# EAGLE board brush_motor_pcb_v1.1 (EAGLE 8.0.1)
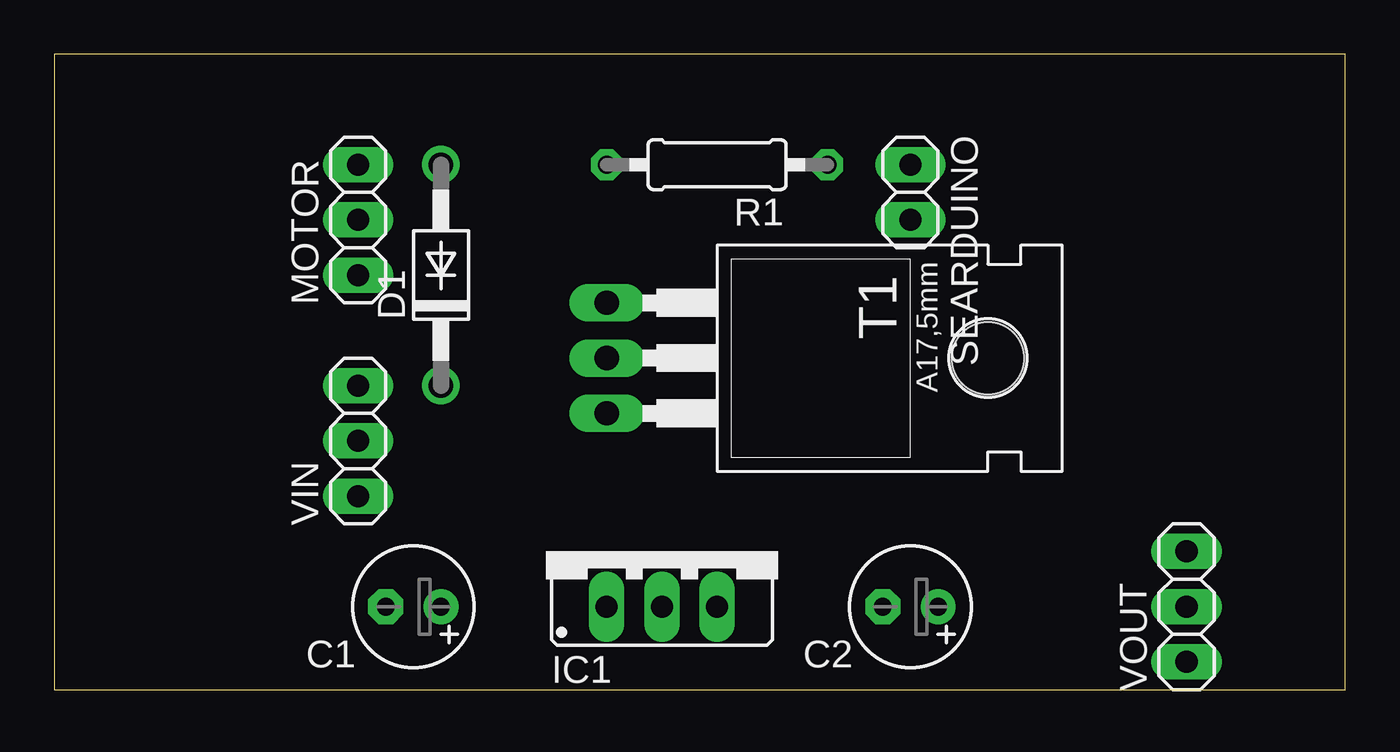
[diagram p0: board, top side]
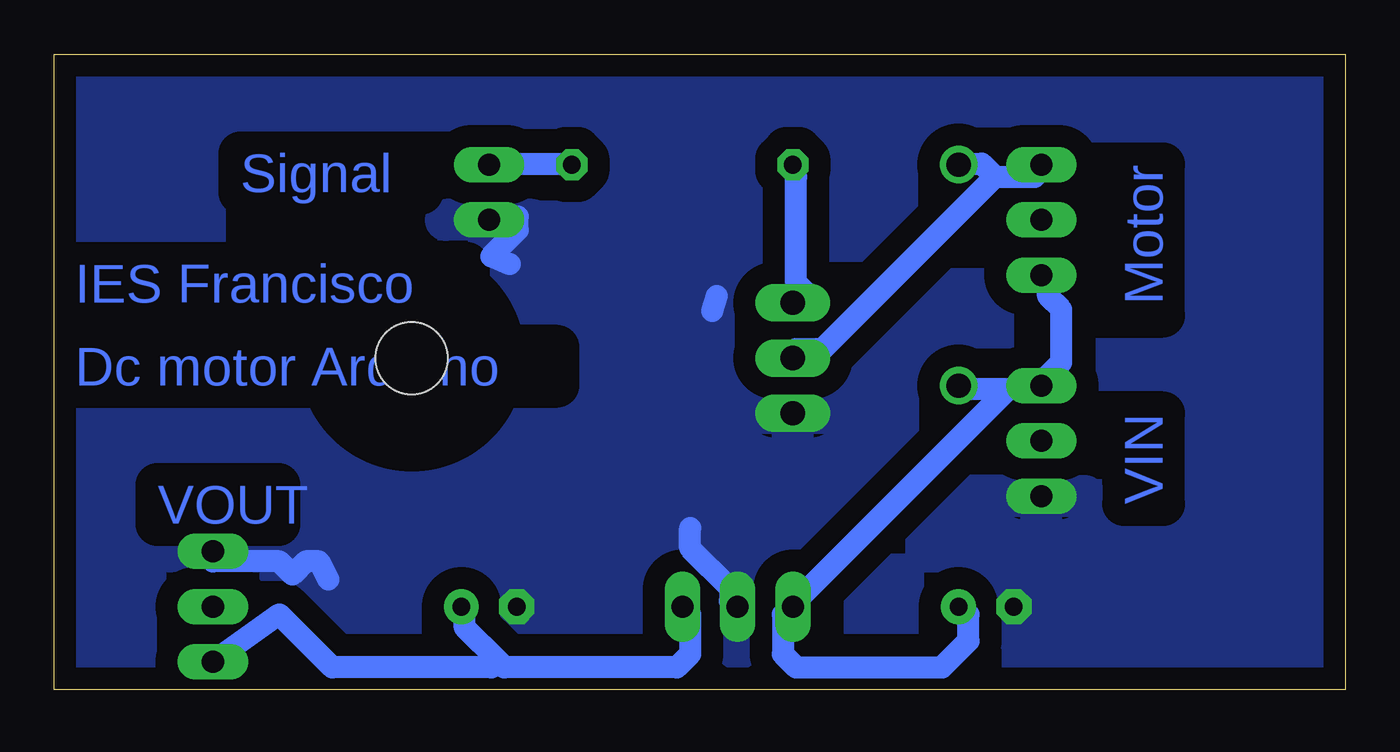
[diagram p1: board, bottom side, seen from below]

Size 59.36 x 29.2 mm. Coordinates in mm from the lower left corner, seen from the top.
Outline: 0,0 59.36,0 59.36,29.2 0,29.2 0,0
Copper layers (1*16): Top 0.035mm / dielectric 1.5mm / Bottom 0.035mm
Design rules "SparkFun *": minimum track width 40mil, minimum drill 20mil, track to track 8mil, track to pad 8mil, pad to pad 8mil, via to via 8mil, smd to smd 8mil, copper to edge 10mil, drill to drill 8mil, minimum pad ring 12mil, minimum via ring 10mil, stop-mask expansion 4mil, vias tented up to drill 25mil, thermal gap 10mil

## Footprints (pad centres in the part's own frame; a part is rotated, then mirrored left to right if it is on the bottom)
E2,5-6 = drill 0.813 pad 1.6: + -1.27,0 | drill 0.813 pad 1.6 octagon: - 1.27,0
DO41-10 = drill 1.118: A 5.08,0; C -5.08,0
78XXS = drill 1.016 long: GND 0,-2.54; IN -2.54,-2.54; OUT 2.54,-2.54
1X03 = drill 1.016 long: 1 -2.54,0; 2 0,0; 3 2.54,0
0207/10 = drill 0.813 octagon: 1 -5.08,0; 2 5.08,0
1X02 = drill 1.016 long: 1 -1.27,0; 2 1.27,0
TO220 = drill 1.118 long: 1 -2.54,-6.35; 2 0,-6.35; 3 2.54,-6.35 | hole 3.302: 0,11.176

## Placement (x,y rotation side)
C1  [E2,5-6]  16.51,3.81 180 top
C2  [E2,5-6]  39.37,3.81 180 top
D1  1N4004  [DO41-10]  17.78,19.05 90 top
IC1  [78XXS]  27.94,6.35 0 top
MOTOR  [1X03]  13.97,21.59 90 top
R1  [0207/10]  30.48,24.13 180 top
SEARDUINO  [1X02]  39.37,22.86 270 top
T1  2N6101  [TO220]  31.75,15.24 270 top
VIN  [1X03]  13.97,11.43 90 top
VOUT  [1X03]  52.07,3.81 90 top

## Library data of the parts
C1 C2 = rcl
D1 = diode
IC1 = v-reg
MOTOR SEARDUINO VIN VOUT = pinhead
R1 = eagle-ltspice; SPICEMODEL: NONE; SPICEPREFIX: R
T1 = transistor

## Nets
GND: C1.- C2.- IC1.GND SEARDUINO.2 T1.3 VIN.1 VOUT.3
N$1: R1.1 SEARDUINO.1
N$2: R1.2 T1.1
N$3: D1.A MOTOR.3 T1.2
N$4: C1.+ D1.C IC1.IN MOTOR.1 VIN.3
N$6: C2.+ IC1.OUT VOUT.1

## Tracks (layer width: path | path; a pad name or v marks a point on that pad's centre or on a via)
GND
  Bottom 1.016: IC1.GND 28.3,4.06 28.3,4.67 30.12,6.5 30.12,7.42 | SEARDUINO.2 39.27,21.74 38.05,21.74 38.05,21.13 39.27,19.91 38.42,19.56 | 28.91,18.09 29.11,17.41 | VOUT.3 52.07,5.89 49.02,5.89 48.41,5.28 47.8,5.89 47.19,5.89 46.77,5.05
  pour Bottom (isolate 1.016): -1.27,30.48 60.96,30.48 60.96,-1.27 -1.27,-1.27
N$1
  Bottom 1.016: R1.1 35.61,24.18 39.27,24.18 SEARDUINO.1
N$2
  Bottom 1.016: R1.2 25.25,23.57 25.25,18.69 24.64,18.09 25.25,17.48 T1.1
N$3
  Bottom 1.016: 16.1,23.57 14.27,23.57 MOTOR.3 | 16.1,23.57 16.71,24.18 17.32,24.18 D1.A | 16.1,23.57 24.03,15.65 25.25,15.65 T1.2
N$4
  Bottom 1.016: C1.+ 17.32,3.45 17.32,2.24 18.54,1.02 25.25,1.02 25.86,1.63 25.86,3.45 IC1.IN 25.25,4.06 15.49,13.82 | 15.49,13.82 17.32,13.82 D1.C | 15.49,13.82 14.27,13.82 VIN.3 | MOTOR.1 13.66,18.69 13.66,18.09 13.06,17.48 13.06,15.04 13.66,14.43 VIN.3 | 15.49,13.82 VIN.3
N$6
  Bottom 1.016: 38.96,1.32 38.66,1.02 30.73,1.02 30.12,1.63 30.12,3.45 IC1.OUT | 38.96,1.32 40.49,2.84 40.49,3.45 C2.+ | VOUT.1 49.02,3.45 46.58,1.02 39.27,1.02 38.96,1.32

## Text on the board
Bottom: Motor | Signal | IES Francisco | Dc motor Arduino | VIN | VOUT